# EAGLE board SynkinoLC_RevA (EAGLE 9.6.2)
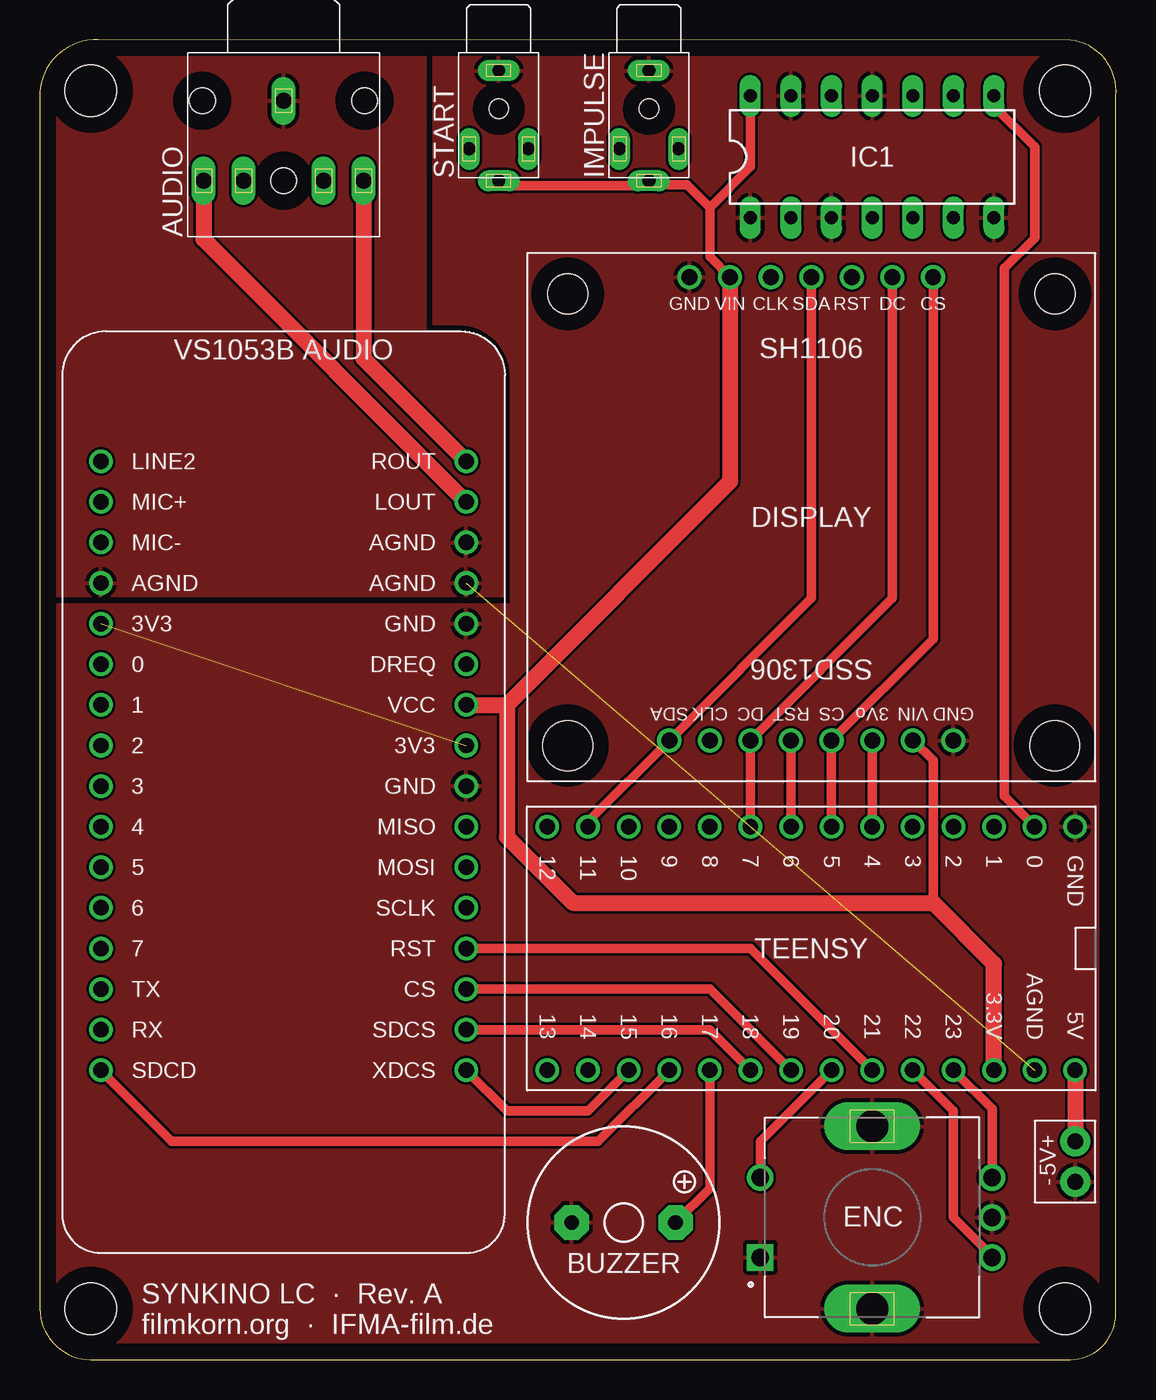
[diagram p0: board, top side]
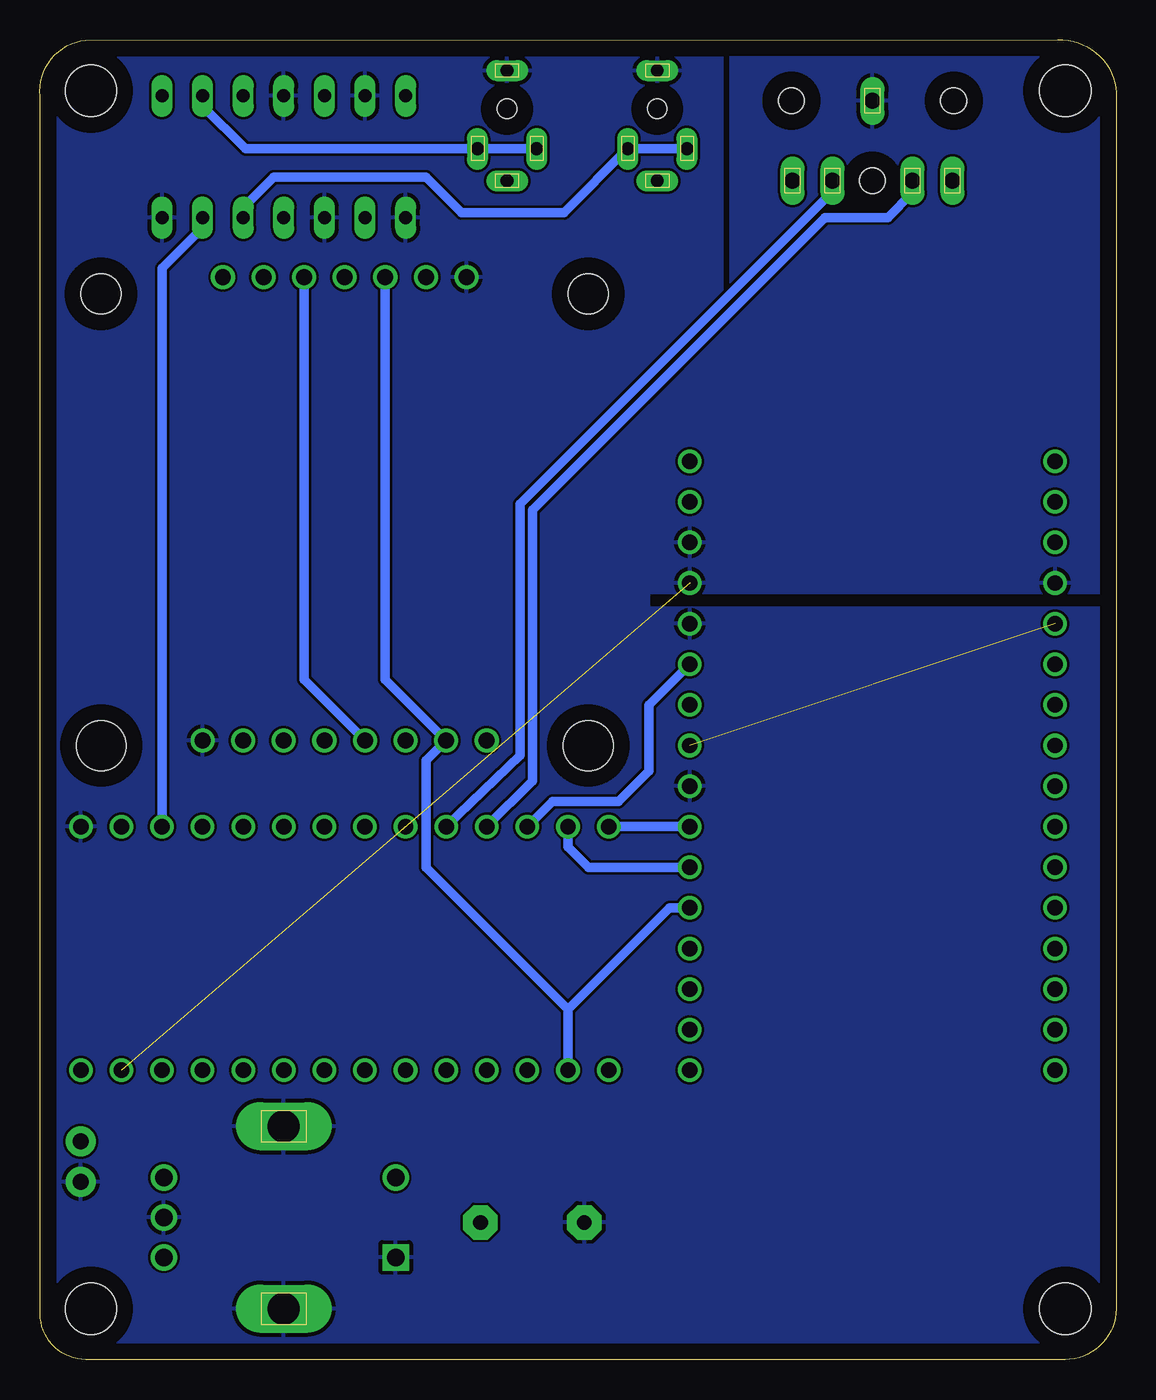
[diagram p1: board, bottom side, seen from below]

Size 67.33 x 82.55 mm. Coordinates in mm from the lower left corner, seen from the top.
Outline: 3.17,0 64.45,0 arc90 67.31,2.86 67.31,79.04 arc90 64.45,82.55 3.64,82.55 arc90 0,79.25 0,3.17 arc90 3.17,0
Copper layers (1*16): Top 0.035mm / dielectric 1.5mm / Bottom 0.035mm
Design rules "default": minimum track width 6mil, minimum drill 0.35mm, track to track 6mil, track to pad 6mil, pad to pad 6mil, via to via 6mil, smd to smd 6mil, copper to edge 40mil, drill to drill 6mil, minimum pad ring 10mil, minimum via ring 8mil, stop-mask expansion 4mil, vias tented up to drill 0mil, thermal gap 10mil
Holes 3.2 mm at 3.17,79.38 3.17,3.17 64.14,79.38 64.14,3.17

## Footprints (pad centres in the part's own frame; a part is rotated, then mirrored left to right if it is on the bottom)
3.5MM_AUDIO_JACK = drill 1 long: RING 5,-5; RSH 2.5,-5; SLEEVE 0,0; TIP -5,-5; TSH -2.5,-5 | hole 1.6: 5.08,0; -5.08,0; 0,-5
F/QMBIII = drill 0.914 pad 2.159 octagon: + 3.251,0; - -3.251,0
SPI_DISPLAY = drill 1: 3VO -3.81,13.97; CS_1 -1.27,13.97; CS_2 -7.62,-15.01; DC_1 3.81,13.97; DC_2 -5.08,-15.01; GND_1 -8.89,13.97; GND_2 7.62,-15.01; MOSI_1 8.89,13.97; MOSI_2 0,-15.01; RST_1 1.27,13.97; RST_2 -2.54,-15.01; SCL_1 6.35,13.97; SCL_2 2.54,-15.01; VIN_1 -6.35,13.97; VIN_2 5.08,-15.01 | hole 2.5: 15.24,-13.97; -15.24,-13.97 | hole 3.1: -15.24,14.3; 15.24,14.3
XDCR_PEC11R-4215F-S0024 = drill 1.1 square: 1 -2.5,7 | drill 1.1: 2 2.5,7; A -2.5,-7.5; B 2.5,-7.5; COM 0,-7.5 | drill 2 long: S1 -5.7,0; S2 5.7,0
DIL14 = drill 0.813 long: 1 -7.62,-3.81; 2 -5.08,-3.81; 3 -2.54,-3.81; 4 0,-3.81; 5 2.54,-3.81; 6 5.08,-3.81; 7 7.62,-3.81; 8 7.62,3.81; 9 5.08,3.81; 10 2.54,3.81; 11 0,3.81; 12 -2.54,3.81; 13 -5.08,3.81; 14 -7.62,3.81
2.5MM_AUDIO_JACK = drill 0.8 long: RING 0,-6.9; SLEEVE 0,0; TIP_1 -1.85,-4.9; TIP_2 1.85,-4.9 | hole 1.2: 0,-2.4
1X02_NO_SILK = drill 1.016 pad 1.88: 1 0,0; 2 2.54,0
TEENSY_3.0-3.2&LC_DIL = drill 0.965: 0 -7.62,13.97; 1 -7.62,11.43; 2 -7.62,8.89; 3 -7.62,6.35; 3.3V 7.62,11.43; 4 -7.62,3.81; 5 -7.62,1.27; 6 -7.62,-1.27; 7 -7.62,-3.81; 8 -7.62,-6.35; 9 -7.62,-8.89; 10 -7.62,-11.43; 11 -7.62,-13.97; 12 -7.62,-16.51; 13 7.62,-16.51; 14/A0 7.62,-13.97; 15/A1 7.62,-11.43; 16/A2 7.62,-8.89; 17/A3 7.62,-6.35; 18/A4 7.62,-3.81; 19/A5 7.62,-1.27; 20/A6 7.62,1.27; 21/A7 7.62,3.81; 22/A8 7.62,6.35; 23/A9 7.62,8.89; AGND 7.62,13.97; GND -7.62,16.51; VIN 7.62,16.51
VS1053B = drill 0.965: 0 -11.43,7.62; 1 -11.43,5.08; 2 -11.43,2.54; 3 -11.43,0; 3V3_1 11.43,2.54; 3V3_2 -11.43,10.16; 4 -11.43,-2.54; 5 -11.43,-5.08; 6 -11.43,-7.62; 7 -11.43,-10.16; AGND1 -11.43,12.7; AGND2 11.43,15.24; AGND3 11.43,12.7; CS 11.43,-12.7; DREQ 11.43,7.62; GND1 11.43,10.16; GND2 11.43,0; LINE2 -11.43,20.32; LOUT 11.43,17.78; MIC+ -11.43,17.78; MIC- -11.43,15.24; MISO 11.43,-2.54; MOSI 11.43,-5.08; ROUT 11.43,20.32; RST 11.43,-10.16; RX -11.43,-15.24; SCLK 11.43,-7.62; SDCD -11.43,-17.78; SDCS 11.43,-15.24; TX -11.43,-12.7; VCC 11.43,5.08; XDCS 11.43,-17.78

## Placement (x,y rotation side)
AUDIO  3.5MM_AUDIO_JACK  [3.5MM_AUDIO_JACK]  15.24,78.75 0 top
BUZZER  F/QMBIII  [F/QMBIII]  36.51,8.57 0 top
DISPLAY  SPI_DISPLAY  [SPI_DISPLAY]  48.26,52.7 180 top
ENC  PEC11R-4215F-S0024  [XDCR_PEC11R-4215F-S0024]  52.07,8.89 90 top
IC1  [DIL14]  52.07,75.25 0 top
IMPULSE  2.5MM_AUDIO_JACK  [2.5MM_AUDIO_JACK]  38.1,80.64 0 top
J4  [1X02_NO_SILK]  64.77,13.65 270 top
START  2.5MM_AUDIO_JACK  [2.5MM_AUDIO_JACK]  28.7,80.64 0 top
TEENSY  TEENSY_3.1-3.2_DIL  [TEENSY_3.0-3.2&LC_DIL]  48.26,25.72 270 top
U$2  VS1053B  [VS1053B]  15.24,35.88 0 top

## Library data of the parts
AUDIO DISPLAY IMPULSE START = synkino
BUZZER = buzzer; OC_FARNELL: unknown; OC_NEWARK: unknown
ENC = PEC11R-4215F-S0024; AVAILABILITY: In Stock; DESCRIPTION: Rotary Encoder Mechanical 24 Quadrature (Incremental) Vertical; MF: Bourns; MP: PEC11R-4215F-S0024; PACKAGE: None; PRICE: None; PURCHASE-URL: https://pricing.snapeda.com/search/part/PEC11R-4215F-S0024/?ref=eda
IC1 = ic-package
J4 = SparkFun-Connectors
TEENSY = Teensy_3_and_LC_Series_Boards_v1.4
U$2 = VS1053B

## Nets
3V3: DISPLAY.VIN_1 DISPLAY.VIN_2 IC1.14 IMPULSE.RING START.RING TEENSY.3.3V U$2.VCC
3V3O: U$2.3V3_1 U$2.3V3_2
5VIN: J4.1 TEENSY.VIN
AGND: AUDIO.SLEEVE TEENSY.AGND U$2.AGND1 U$2.AGND2 U$2.AGND3
BUZZER: BUZZER.+ TEENSY.17/A3
DREQ: TEENSY.10 U$2.DREQ
ENC_A: ENC.A TEENSY.22/A8
ENC_B: ENC.B TEENSY.23/A9
ENC_BTN: ENC.2 TEENSY.20/A6
GND: BUZZER.- DISPLAY.GND_1 DISPLAY.GND_2 ENC.1 ENC.COM ENC.S1 ENC.S2 IC1.1 IC1.3 IC1.7 IC1.11 IC1.13 IMPULSE.SLEEVE J4.2 START.SLEEVE TEENSY.GND U$2.GND1 U$2.GND2
IMPULSE_A: IC1.9 IMPULSE.TIP_1 IMPULSE.TIP_2
IMPULSE_D: IC1.8 TEENSY.0
LOUT: AUDIO.TIP U$2.LOUT
MISO: TEENSY.12 U$2.MISO
MOSI: DISPLAY.MOSI_1 DISPLAY.MOSI_2 TEENSY.11 U$2.MOSI
OLED_CS: DISPLAY.CS_1 DISPLAY.CS_2 TEENSY.5
OLED_DC: DISPLAY.DC_1 DISPLAY.DC_2 TEENSY.7
OLED_RES: DISPLAY.RST_1 DISPLAY.RST_2 TEENSY.6
ROUT: AUDIO.RING U$2.ROUT
RSH: AUDIO.RSH TEENSY.8
SCLK: DISPLAY.SCL_1 DISPLAY.SCL_2 TEENSY.14/A0 U$2.SCLK
SDCD: TEENSY.16/A2 U$2.SDCD
SDCS: TEENSY.18/A4 U$2.SDCS
SSD1306: DISPLAY.3VO TEENSY.4
START_A: IC1.5 START.TIP_1 START.TIP_2
START_D: IC1.6 TEENSY.1
TSH: AUDIO.TSH TEENSY.9
VS1053_CS: TEENSY.19/A5 U$2.CS
VS1053_RST: TEENSY.21/A7 U$2.RST
XDCS: TEENSY.15/A1 U$2.XDCS

## Tracks (layer width: path | path; a pad name or v marks a point on that pad's centre or on a via)
3V3
  Top 0.61: 55.88,28.57 55.88,37.47 DISPLAY.VIN_1 | IC1.14 44.45,74.61 41.91,72.07 | 41.91,72.07 41.91,68.98 DISPLAY.VIN_2 | 41.91,72.07 40.49,73.49 38.35,73.49 IMPULSE.RING 37.78,73.43 29.02,73.43 START.RING
  Top 1.016: U$2.VCC 29.21,40.96 | 29.21,40.96 29.21,32.7 33.34,28.57 55.88,28.57 59.69,24.77 TEENSY.3.3V | DISPLAY.VIN_2 43.18,54.93 29.21,40.96
3V3O  (1 unrouted)
5VIN
  Top 1.016: TEENSY.VIN J4.1
AGND  (1 unrouted)
  pour Top: 0,82.55 24.13,82.55 24.13,64.26 26.3,64.26 arc-90 28.96,61.6 28.96,47.75 0,47.75
  pour Bottom: 0,82.55 24.13,82.55 24.13,66.04 29.08,61.09 29.08,47.94 0,47.94
BUZZER
  Top 0.61: TEENSY.17/A3 41.91,10.72 BUZZER.+
DREQ
  Bottom 0.61: U$2.DREQ 29.21,40.96 29.21,36.83 31.11,34.92 35.24,34.92 TEENSY.10
ENC_A
  Top 0.61: ENC.A 59.57,6.47 57.15,8.89 57.15,15.56 TEENSY.22/A8
ENC_B
  Top 0.61: ENC.B 59.57,15.68 TEENSY.23/A9
ENC_BTN
  Top 0.61: TEENSY.20/A6 45.07,13.64 ENC.2
GND
  pour Top: 0,47.24 29.46,47.24 29.46,61.49 arc90 26.19,64.77 24.64,64.77 24.64,82.55 67.31,82.55 67.31,0 0,0
  pour Bottom: -0.25,47.05 29.21,47.05 29.21,61.47 24.64,66.04 24.64,82.04 67.06,82.04 67.06,-0.51 -0.25,-0.51
IMPULSE_A
  Bottom 0.61: IC1.9 57.15,78.42 54.47,75.75 IMPULSE.TIP_2 IMPULSE.TIP_1
IMPULSE_D
  Top 0.61: IC1.8 59.69,78.42 62.23,75.88 62.23,70.17 60.33,68.26 60.33,35.24 TEENSY.0
LOUT
  Top 1.016: AUDIO.TIP 10.24,70.09 U$2.LOUT
MISO
  Bottom 0.61: TEENSY.12 U$2.MISO
MOSI
  Top 0.61: TEENSY.11 34.29,33.66 DISPLAY.MOSI_1 48.26,47.62 DISPLAY.MOSI_2
  Bottom 0.61: U$2.MOSI 33.02,30.8 34.29,32.07 TEENSY.11
OLED_CS
  Top 0.61: DISPLAY.CS_2 55.88,45.09 DISPLAY.CS_1 TEENSY.5
OLED_DC
  Top 0.61: DISPLAY.DC_2 53.34,47.62 DISPLAY.DC_1 TEENSY.7
OLED_RES
  Top 0.61: DISPLAY.RST_1 TEENSY.6
  Bottom 0.61: DISPLAY.RST_2 50.8,42.55 DISPLAY.RST_1
ROUT
  Top 1.016: AUDIO.RING 20.24,62.63 U$2.ROUT
RSH
  Bottom 0.61: TEENSY.8 37.27,37.78 37.27,53.53 17.74,73.06 AUDIO.RSH
SCLK
  Bottom 0.61: DISPLAY.SCL_2 45.72,42.55 DISPLAY.SCL_1 43.18,37.47 43.18,30.8 34.29,21.91 | 34.29,21.91 27.94,28.26 U$2.SCLK | TEENSY.14/A0 34.29,21.91
SDCD
  Top 0.61: U$2.SDCD 8.26,13.65 34.92,13.65 TEENSY.16/A2
SDCS
  Top 0.61: U$2.SDCS 41.91,20.64 TEENSY.18/A4
SSD1306
  Top 0.61: DISPLAY.3VO TEENSY.4
START_A
  Bottom 0.61: IC1.5 54.61,72.07 52.7,73.98 43.18,73.98 40.96,71.75 34.54,71.75 START.TIP_2 START.TIP_1
START_D
  Bottom 0.61: IC1.6 57.15,70.8 59.69,68.26 TEENSY.1
TSH
  Bottom 0.61: TEENSY.9 36.51,36.2 36.51,53.15 18.22,71.44 14.29,71.44 12.74,72.98 AUDIO.TSH
VS1053_CS
  Top 0.61: U$2.CS 41.91,23.18 TEENSY.19/A5
VS1053_RST
  Top 0.61: U$2.RST 44.45,25.72 TEENSY.21/A7
XDCS
  Top 0.61: TEENSY.15/A1 34.29,15.56 29.21,15.56 U$2.XDCS

## Text on the board
tNames: + | 5V | - | SYNKINO LC · Rev. A / filmkorn.org · IFMA-film.de